# Altium PCB MiniBoard.PcbDoc
Units mil, origin at the board's own origin, x right, y up, seen from the top; angles counter-clockwise.
Board outline 3937.01 x 3937.01 mil, 2 copper layers (Top Layer, Bottom Layer); 94 components, 75 nets, 330 pads, 65 vias.
Unrouted connection lines stored in the file: 4.
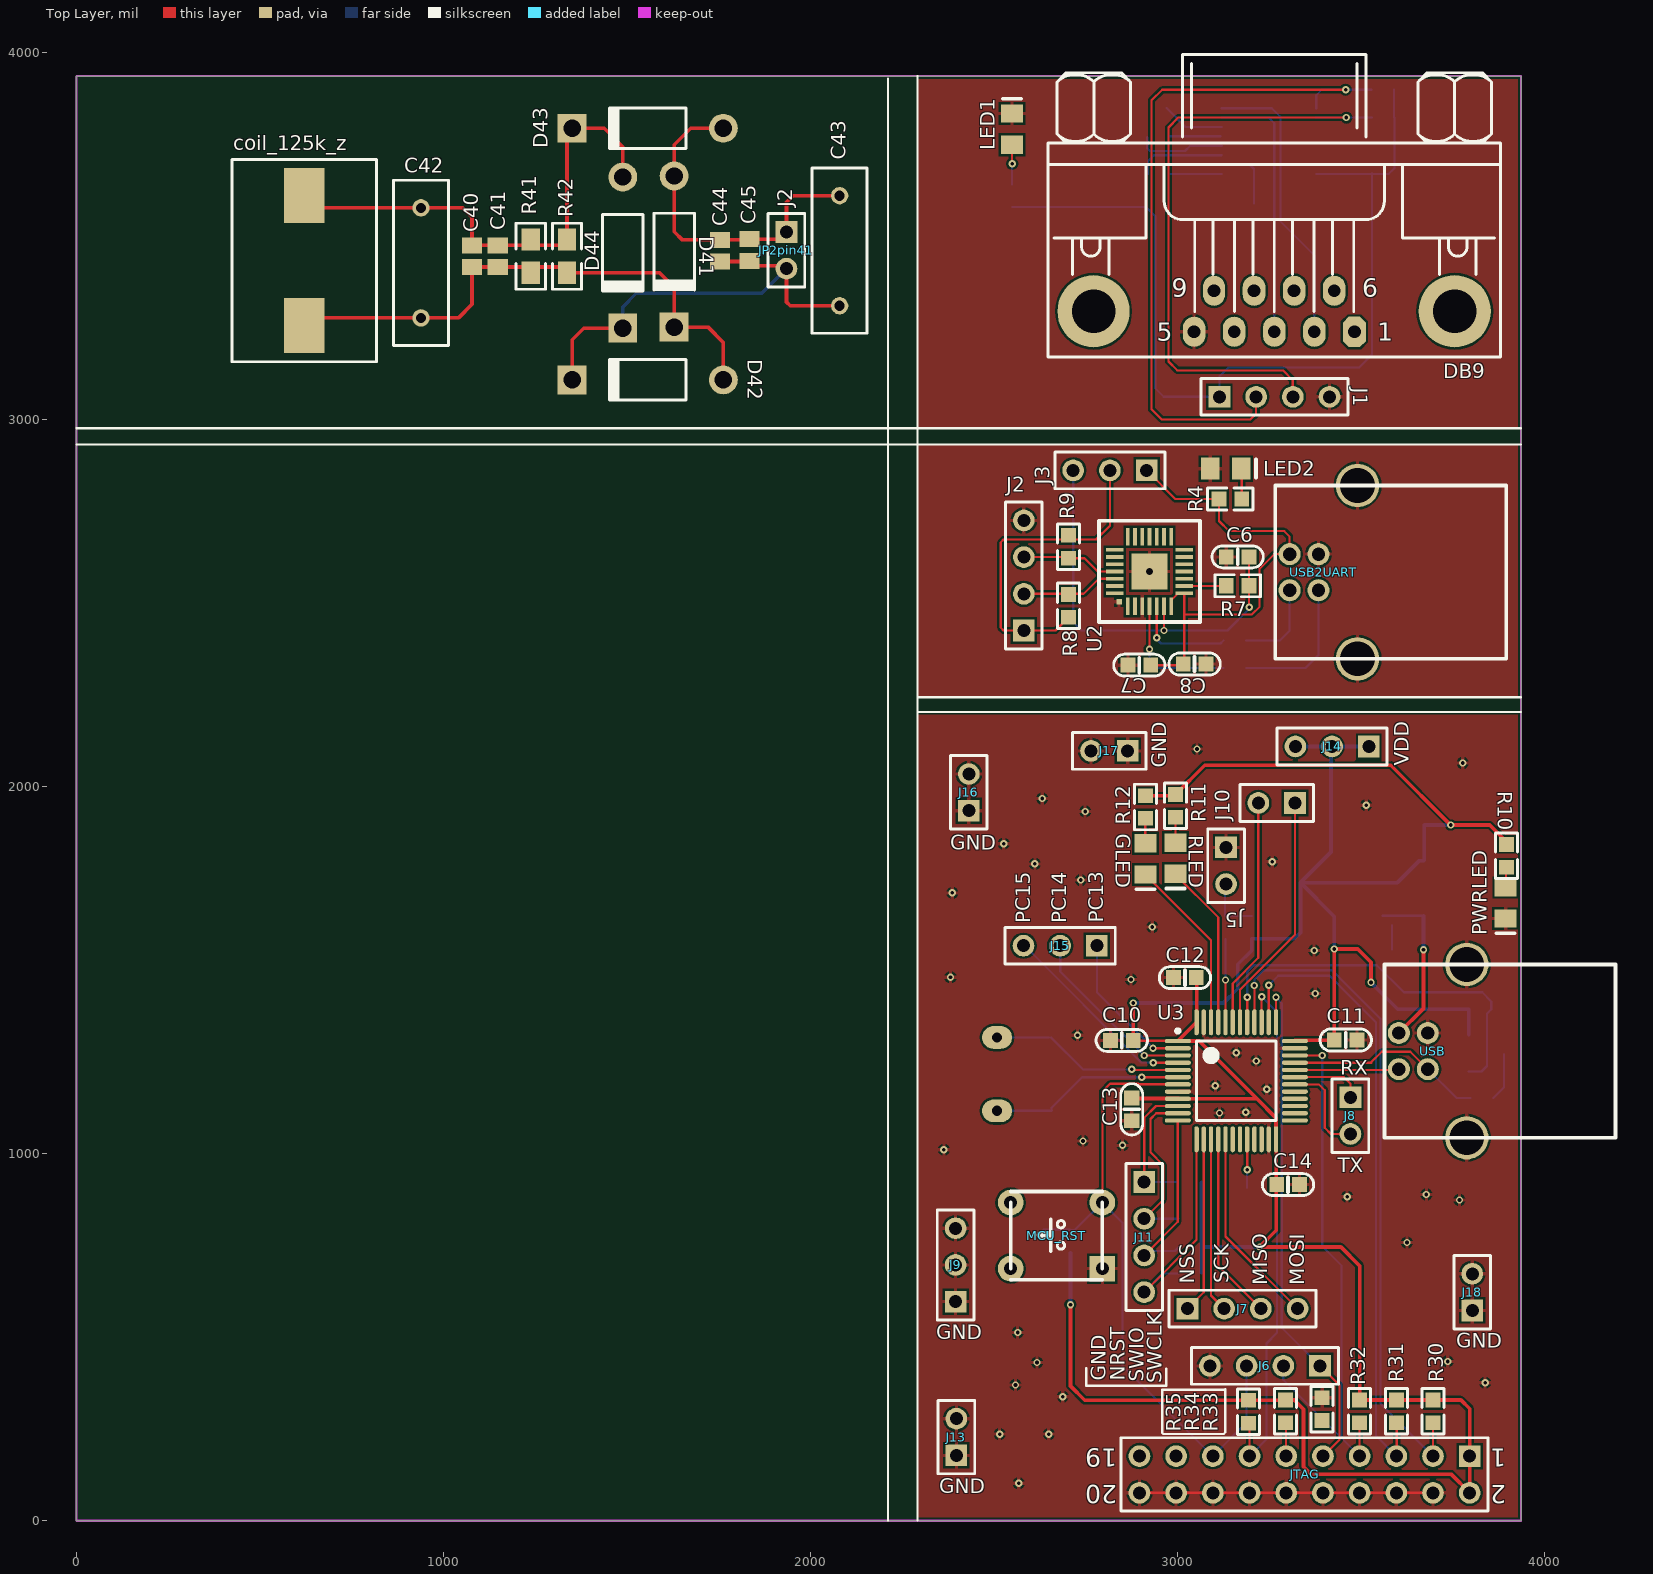
[diagram p0: Top Layer view]
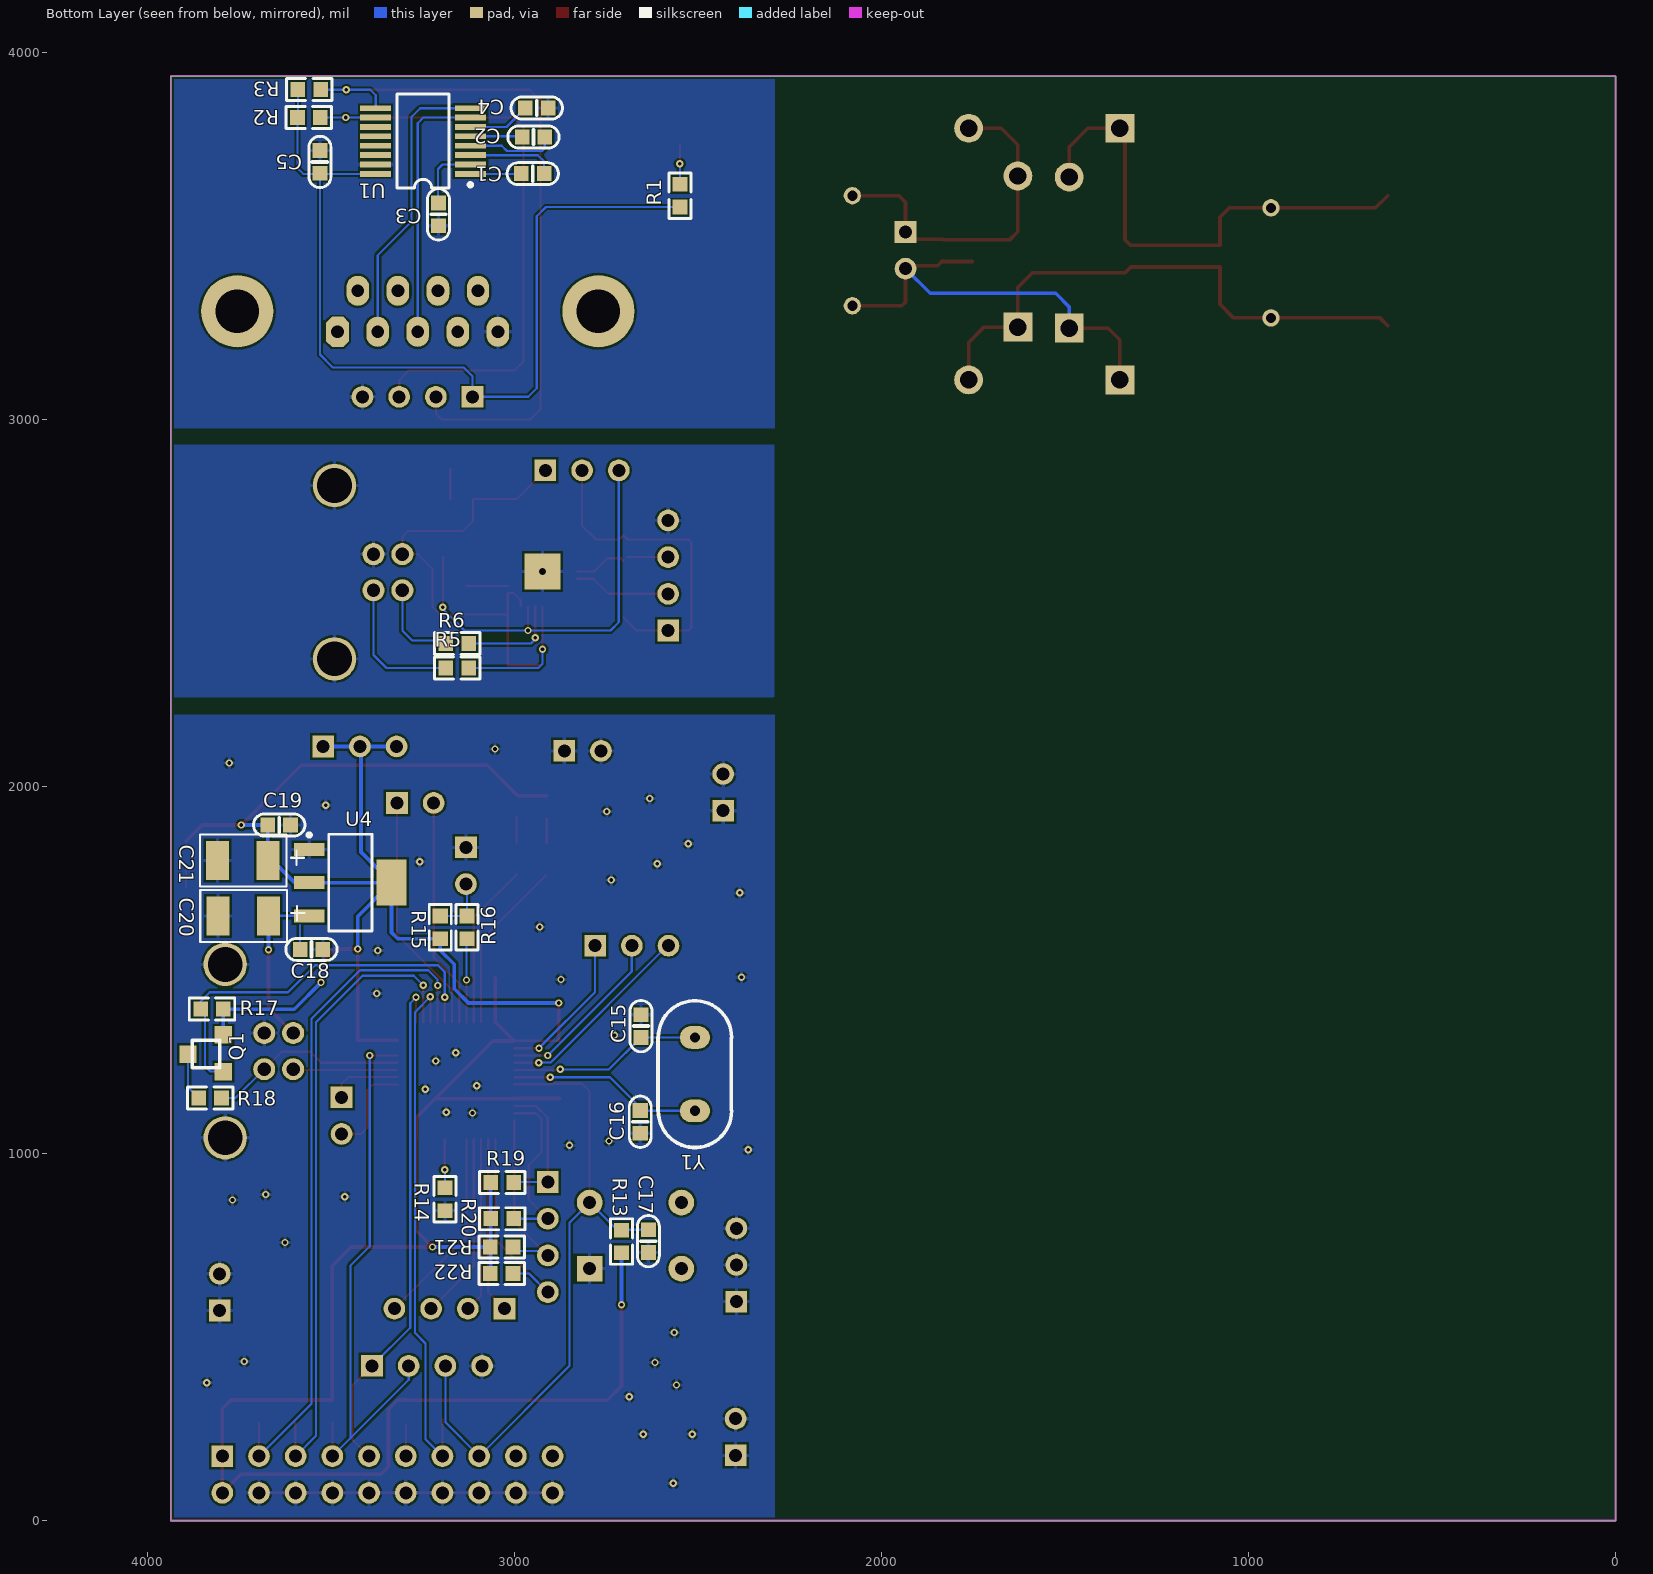
[diagram p1: Bottom Layer view, seen from below]
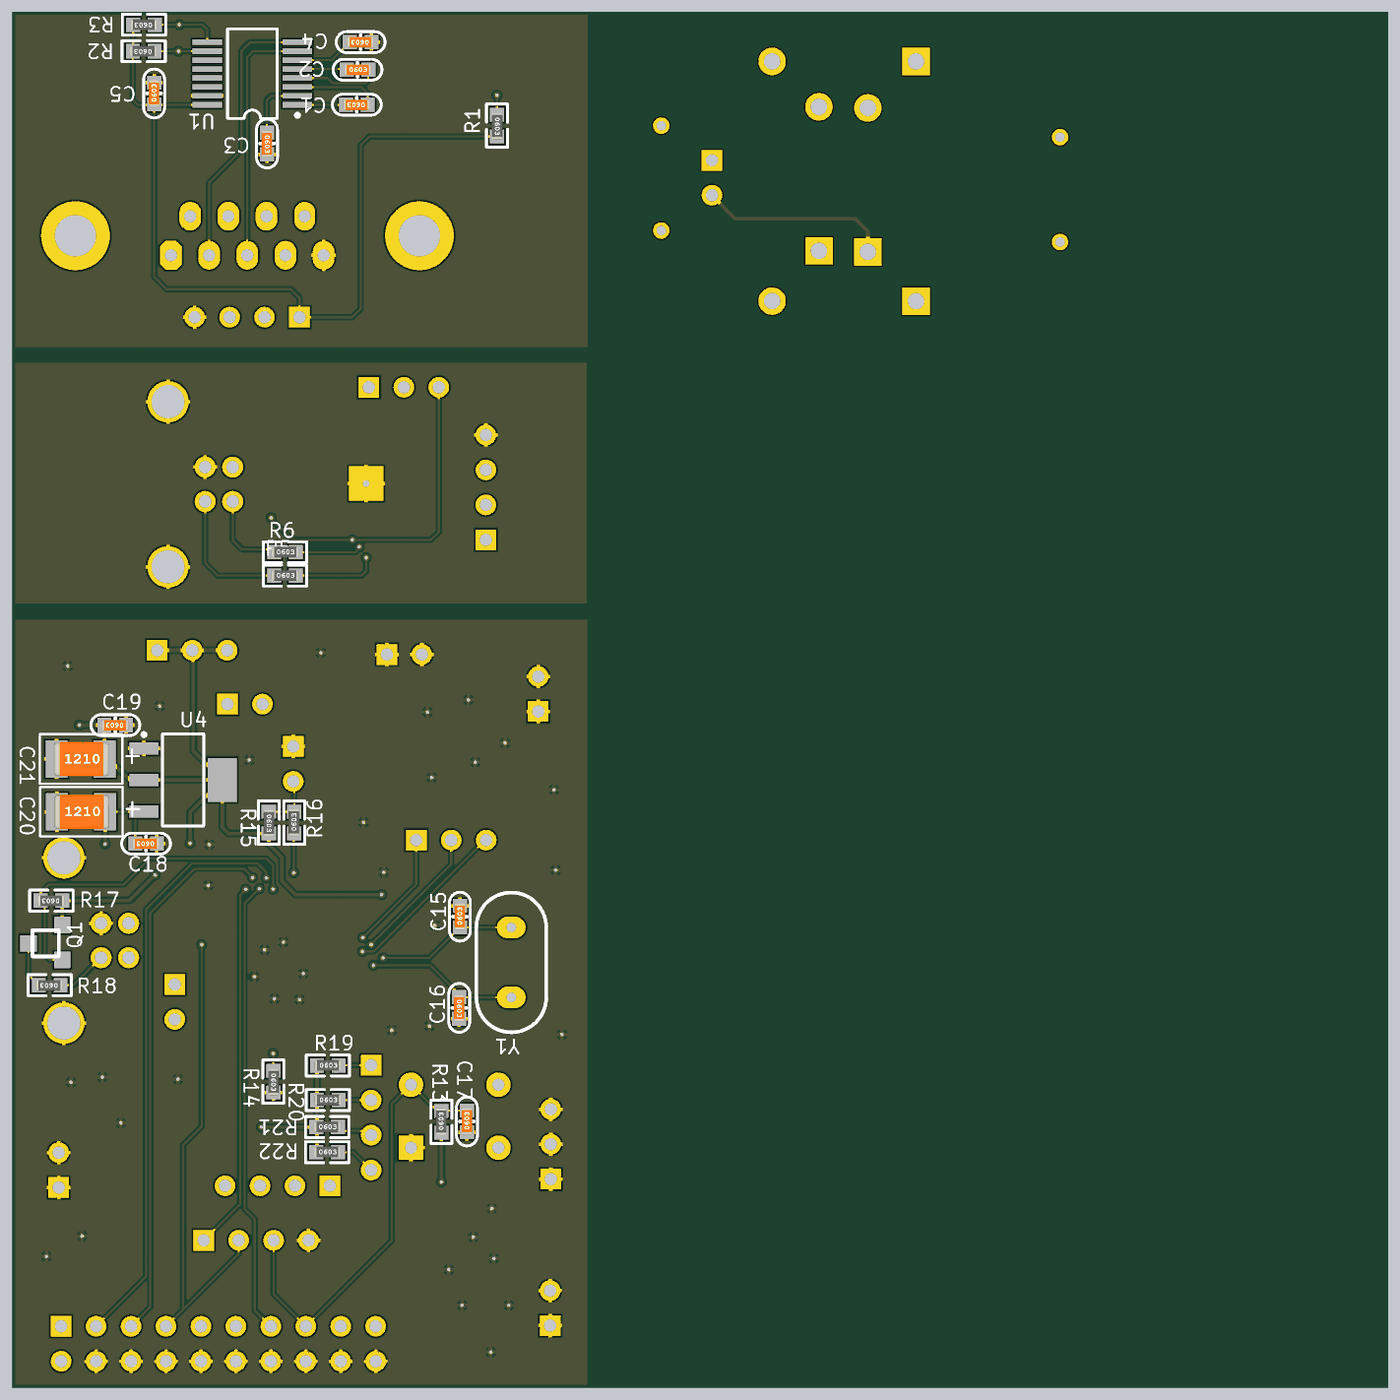
[diagram p2: 3D render of the assembled board from below, using the file's embedded part models]

## Layer stack, top to bottom
Top Layer: signal copper 1.4
Dielectric: dielectric 12.6, FR-4, Dk 4.8
Bottom Layer: signal copper 1.4

## Board outline
0,0 3937.01,0 3937.01,3937.01 3870.08,3937.01 0,3937.01 0,0

## Design rules (kind name [scope] priority, off if disabled: settings)
Clearance [All] p1: gap=6
PolygonConnect [All] p1: connectstyle=Relief reliefconductorwidth=10 reliefentries=4 polygonreliefangle="90 Angle"
RoutingVias [All] p1: holewidth=28 width=50 viastyle="Through Hole" minholewidth=28 minwidth=50 maxholewidth=28 maxwidth=50
SilkscreenOverComponentPads [All] p1: minsilkscreentomaskgap=10
SolderMaskExpansion [All] p1: expansion=4
Width [All] p1: maxlimit=10 minlimit=6 preferedwidth=6
27 further rules are at their usual default settings.

## Classes and differential pairs
component class MiniBoard: USB
component class Max3232: C1 C2 C3 C4 C5 DB9 J1 LED1 R1 R2 R3 U1
component class CP2102: C6 C7 J2 J3 LED2 R4 R5 R6 R7 R8 R9 U2 USB2UART
component class test_anta: C40 C41 C42 C43 C44 C45 coil_125k_z D41 D43 D44 JP2pin41 R41 R42

## Components (designator, comment, footprint, x,y, rotation, side; value= is the part's Value field where it differs from the comment)
C1 "0.1u" C0603 2951,3671 r0 bottom
C2 "0.47u" C0603 2949,3771 r180 bottom
C3 "0.47u" C0603 3208,3560 r270 bottom
C4 "0.47u" C0603 2940,3850 r0 bottom
C5 "0.1u" C0603 3531,3703 r90 bottom
C6 "0.1u" C0603 3164.54,2626.79 r180 top
C7 "1u" C0603 2896.82,2331.51 r180 top
C8 "0.1u" C0603 3047.24,2334.65 r0 top
C10 "0.1uF" C0603 2849,1309 r0 top
C11 "0.1uF" C0603 3459,1310 r180 top
C12 "0.1uF" C0603 3021,1480 r0 top
C13 "0.1uF" C0603 2876,1121 r90 top
C14 "0.1uF" C0603 3302,916 r180 top
C15 "20pF" C0603 2656,1348 r90 bottom
C16 "20pF" C0603 2658,1087 r270 bottom
C17 "0.1uF" C0603 2636,762 r90 bottom
C18 "0.1uF" C0603 3554,1557 r0 bottom
C19 "0.1uF" C0603 3642,1896 r0 bottom
C20 "10uF" 1210-A 3743,1648 r180 bottom
C21 "10uF" 1210-A 3744,1799 r180 bottom
C40 "CAP" C0805 1078,3446 r90 top
C41 "CAP" C0805 1148,3446 r90 top
C42 "CAP" RAD-0.3 939,3428 r90 top
C43 "Cap" RAD-0.3 2080,3461 r270 top
C44 "CAP" C0805 1754,3461 r90 top
C45 "CAP" C0805 1834,3463 r90 top
coil_125k_z "coli_125k" coil_125k 621,3434 r270 top
D41 "Diode 11DQ03" DO-204AL 1629,3458.83 r270 top
D42 "Diode 11DQ03" DO-204AL 1557,3109 r180 top
D43 "Diode 11DQ03" DO-204AL 1557,3794.83 r180 top
D44 "Diode 11DQ03" DO-204AL 1489,3455.83 r270 top
DB9 "DB9" DB9 3264,3296 r0 top locked
GLED "LED" LED0805 2913,1846 r270 top
J1 "CON4" HDR1X4 3115,3063 r0 top
J2 "CON4" HDR1X4 2581.86,2426 r90 top
J3 "CON3" HDR1X3 2916.5,2862.51 r180 top
J5 "CON2" HDR1X2 3133,1835 r270 top
J6 "SWD" SWD 3389,422 r180 top
J7 "SPI" HDR1X4 3028,578 r0 top
J8 "UART1" HDR1X2 3472,1154 r270 top
J9 "CON3" HDR1X3 2396,597 r90 top
J10 "IIC1" HDR1X2 3321,1956 r180 top
J11 "CON4" HDR1X4 2910,923 r270 top
J13 "IIC1" HDR1X2 2398,178 r90 top
J14 "CON3" HDR1X3 3522,2110 r180 top
J15 "CON3" HDR1X3 2781,1567 r180 top
J16 "IIC1" HDR1X2 2432,1935 r90 top
J17 "IIC1" HDR1X2 2865,2098 r180 top
J18 "IIC1" HDR1X2 3804,573 r90 top
JP2pin41 "JUMP2" HDR1X2 1935,3512 r270 top
JTAG "JTAG" HDR2X10 3797,176 r180 top
LED1 "" LED0805 2550,3750 r90 top
LED2 "" LED0805 3089.73,2866.94 r0 top
MCU_RST "BUTTON" BUTTON-S 2546,687 r90 top
PWRLED "LED" LED0805 3895,1726 r270 top
Q1 "SI2301" SOT-23-2301 3804,1234 r90 bottom
R1 "4.7K" R0603 2550,3611 r270 bottom
R2 "4.7K" R0603 3561,3824 r0 bottom
R3 "4.7K" R0603 3560,3900 r0 bottom
R4 "1K" R0603 3144.85,2784.27 r0 top
R5 "33" R0603 3156.66,2323.64 r180 bottom
R6 "33" R0603 3156.66,2390.57 r180 bottom
R7 "4.7K" R0603 3164.54,2548.05 r0 top
R8 "4.7K" R0603 2703.91,2492.93 r270 top
R9 "4.7K" R0603 2703.91,2654.35 r90 top
R10 "1K" R0603 3897,1812 r270 top
R11 "10K" R0603 2995,1948 r90 top
R12 "10K" R0603 2913,1945 r90 top
R13 "10K" R0603 2709,761 r90 bottom
R14 "100K" R0603 3190,876 r270 bottom
R15 "RES" R0603 3203,1617 r270 bottom
R16 "RES" R0603 3130,1617 r90 bottom
R17 "100K" R0603 3825,1394 r0 bottom
R18 "1.5K" R0603 3830,1152 r0 bottom
R19 "10K" R0603 3034,922 r180 bottom
R20 "10K" R0603 3034,823 r180 bottom
R21 "10K" R0603 3036,746 r180 bottom
R22 "10K" R0603 3036,674 r180 bottom
R30 "10K" R0603 3697,298 r270 top
R31 "10K" R0603 3598,298 r270 top
R32 "10K" R0603 3497,298 r270 top
R33 "10K" R0603 3395,304 r90 top
R34 "10K" R0603 3295,298 r270 top
R35 "10K" R0603 3194,297 r270 top
R41 "RES1" 0805 1238,3401 r90 top
R42 "RES1" 0805 1337,3401 r90 top
RLED "LED" LED0805 2995,1848 r270 top
U1 "MAX3232" SSOP-16-SP3232 3250,3760 r90 bottom
U2 "CP2102" CP2102 2825.95,2488.5 r90 top
U3 "STM32F103C8" LQFP48_N 3161,1199 r0 top
U4 "LM1117MP-3.3" MP04A_L 3448,1739 r180 bottom
USB "USB" USB-B 3604,1329 r180 top
USB2UART "USB" USB-B 3306.27,2634.17 r180 top
Y1 "8M" XTAL 2509,1217 r270 bottom

## Footprints (in the part's own frame and the unit in brackets; to place one, negate y for a bottom-side part, rotate by r counter-clockwise, add the part's x,y. Pads: shape width x height; smd on the part's side, far side on the other; paste and mask are expansions set on the pad)
0805 [mil]
  rect 60x50 smd: 1(0,0) 2(90,0)
  silkscreen extent -45,-40 135,40
1210-A [mm]
  rect 1.6x2.7 smd: 1(1.825,0) 2(-1.675,0)
  silkscreen extent -2.9,-1.8 4.3,1.8, body extent -1.87,-1.24 2.13,1.24, height 1.7
BUTTON-S [mil]
  rect 70x70 hole 35: 1(0,-250)
  round 70 hole 35: 2(180,-250) 3(0,0) 4(180,0)
  silkscreen extent -30,-250 210,0
C0603 [mil] "电?"
  rect 40x41 smd: 1(-31,0) 2(31,0)
  silkscreen extent -70,-30 70,30, body extent -39,-15 40,16, height 31
C0805 [mm] "Chip Capacitor, Bo"
  rect 1.1x1.4 smd: 1(-0.75,0) 2(0.75,0)
  body extent -1.1,-0.72 1.1,0.72, height 1.4
coil_125k [mm]
  rect 3.8x2.8 smd: 1(-4.5,0) 2(4.5,0)
  silkscreen extent -7,-5 7,5
CP2102 [mm]
  rect 0.4x0.4 smd: 0(0.4,-0.4)
  rect 2.5x2.5 hole 0.5: 0(2.5,-2.5)
  rect 1.2x0.254 smd: 1(0.1,-1) 2(0.1,-1.5) 3(0.1,-2) 4(0.1,-2.5) 5(0.1,-3) 6(0.1,-3.5) 7(0.1,-4) 15(4.9,-4) 16(4.9,-3.5) 17(4.9,-3) 18(4.9,-2.5) 19(4.9,-2) 20(4.9,-1.5) 21(4.9,-1)
  rect 0.254x1.2 smd: 8(1,-4.9) 9(1.5,-4.9) 10(2,-4.9) 11(2.5,-4.9) 12(3,-4.9) 13(3.5,-4.9) 14(4,-4.9) 22(4,-0.1) 23(3.5,-0.1) 24(3,-0.1) 25(2.5,-0.1) 26(2,-0.1) 27(1.5,-0.1) 28(1,-0.1)
  silkscreen extent -1,-6 6,1
DB9 [mil]
  oct 62x82 hole 35: 1(218.75,-55.83)
  oval 62x82 hole 35: 2(109.58,-55.83) 3(0.42,-55.83) 4(-108.75,-55.83) 5(-217.92,-55.83) 6(163.75,55.83) 7(54.58,55.83) 8(-54.58,55.83)
  oval 60x82 hole 35: 9(-163.75,55.83)
  round 196.67 hole 118.33: BO1(-492.08,0) BO2(492.08,0)
  silkscreen extent -616,-125 617,700
DO-204AL [mm] "Diode, Axial; Body 5.2 x 2.7 mm (LxDia. max), Lead Dia. 0.86 mm (max)"
  round 2 hole 1.2: 1(-5.23,0)
  rect 2x2 hole 1.2: 2(5.23,0)
  silkscreen extent -2.65,-1.41 2.74,1.4
HDR1X2 [mm] "Connector; Header; 2 Position"
  rect 1.5x1.5 hole 0.9: 1(0,0)
  round 1.5 hole 0.9: 2(2.54,0)
  silkscreen extent -1.27,-1.27 3.81,1.27
HDR1X3 [mm] "Connector; Header; 3 Position"
  rect 1.5x1.5 hole 0.9: 1(0,0)
  round 1.5 hole 0.9: 2(2.54,0) 3(5.08,0)
  silkscreen extent -1.27,-1.27 6.35,1.27
HDR1X4 [mm] "Connector; Header; 4 Position"
  rect 1.5x1.5 hole 0.9: 1(0,0)
  round 1.5 hole 0.9: 2(2.54,0) 3(5.08,0) 4(7.62,0)
  silkscreen extent -1.27,-1.27 8.89,1.27
HDR2X10 [mm] "Connector; Header; 10x2 Position"
  rect 1.5x1.5 hole 0.9: 1(0,0)
  round 1.5 hole 0.9: 2(0,2.54) 3(2.54,0) 4(2.54,2.54) 5(5.08,0) 6(5.08,2.54) 7(7.62,0) 8(7.62,2.54) 9(10.16,0) 10(10.16,2.54) 11(12.7,0) 12(12.7,2.54) 13(15.24,0) 14(15.24,2.54) 15(17.78,0) 16(17.78,2.54) 17(20.32,0) 18(20.32,2.54) 19(22.86,0) 20(22.86,2.54)
  silkscreen extent -1.27,-1.27 24.13,3.81
LED0805 [mil]
  rect 50x60 smd: 1(0,0) 2(85,0)
  silkscreen extent 125,-25 125,25, body extent 0,-18 82,18, height 33
LQFP48_N [mm] "Thin QFP, 48-Leads, Body 7x7mm, Pitch 0.5mm, IPC Medium Density"
  oval 1.8x0.3 smd: 1(-4.05,2.75) 2(-4.05,2.25) 3(-4.05,1.75) 4(-4.05,1.25) 5(-4.05,0.75) 6(-4.05,0.25) 7(-4.05,-0.25) 8(-4.05,-0.75) 9(-4.05,-1.25) 10(-4.05,-1.75) 11(-4.05,-2.25) 12(-4.05,-2.75) 25(4.05,-2.75) 26(4.05,-2.25) 27(4.05,-1.75) 28(4.05,-1.25) 29(4.05,-0.75) 30(4.05,-0.25) 31(4.05,0.25) 32(4.05,0.75) 33(4.05,1.25) 34(4.05,1.75) 35(4.05,2.25) 36(4.05,2.75)
  oval 0.3x1.8 smd: 13(-2.75,-4.05) 14(-2.25,-4.05) 15(-1.75,-4.05) 16(-1.25,-4.05) 17(-0.75,-4.05) 18(-0.25,-4.05) 19(0.25,-4.05) 20(0.75,-4.05) 21(1.25,-4.05) 22(1.75,-4.05) 23(2.25,-4.05) 24(2.75,-4.05) 37(2.75,4.05) 38(2.25,4.05) 39(1.75,4.05) 40(1.25,4.05) 41(0.75,4.05) 42(0.25,4.05) 43(-0.25,4.05) 44(-0.75,4.05) 45(-1.25,4.05) 46(-1.75,4.05) 47(-2.25,4.05) 48(-2.75,4.05)
  silkscreen extent -4.17,-2.75 2.75,3.57, body extent -3.5,-3.5 3.5,3.5, height 1.6
MP04A_L [mm] "SOT223, 4-Leads, Body 6.5x3.5mm, Pitch 2.3mm, Lead Span 7mm, IPC High Density"
  rect 2.1x0.9 smd: 1(-2.85,2.3) 2(-2.85,0) 3(-2.85,-2.3)
  rect 2.1x3.2 smd: 4(2.85,0)
  silkscreen extent -2.98,-3.35 1.5,3.42, body extent -1.85,-3.35 1.85,3.35, height 1.8
R0603 [mil] "电?"
  rect 40x41 smd: 1(-31,0) 2(31,0)
  silkscreen extent -62,-30 62,30, body extent -39,-15 40,16, height 32
RAD-0.3 [mm] "Radial Cap, Thru-Hol"
  round 1.2 hole 0.7: 1(-3.81,0) 2(3.81,0)
  silkscreen extent -5.71,-1.91 5.71,1.91
SOT-23-2301 [mm]
  rect 1.2x1.2 smd: 1(-0.254,-0.254) 2(2.286,-0.254) 3(0.95,2.2)
  silkscreen extent 0,0 1.91,1.91
SSOP-16-SP3232 [mm]
  rect 0.4x2.15 smd: 1(-2.275,-3.275) 2(-1.625,-3.275) 3(-0.975,-3.275) 4(-0.325,-3.275) 5(0.325,-3.275) 6(0.975,-3.275) 7(1.625,-3.275) 8(2.275,-3.275) 9(2.275,3.275) 10(1.625,3.275) 11(0.975,3.275) 12(0.325,3.275) 13(-0.325,3.275) 14(-0.975,3.275) 15(-1.625,3.275) 16(-2.275,3.275)
  silkscreen extent -3.25,-3.4 3.25,1.8
SWD [mm] "Connector; Header; 4 Position"
  rect 1.5x1.5 hole 0.9: 1(0,0)
  round 1.5 hole 0.9: 2(2.54,0) 3(5.08,0) 4(7.62,0)
  silkscreen extent -1.27,-1.27 8.89,1.27
USB-B [mm]
  round 1.524 hole 0.92: 1(0,0) 2(0,2.5) 3(-2,2.5) 4(-2,0)
  round 3 hole 2.4: 5(-4.7,7.25) 6(-4.7,-4.75)
  silkscreen extent -15,-4.75 1,7.25
XTAL [mil]
  oval 62x82 hole 28: 1(-100,0) 2(100,0)
  silkscreen extent -200,-100 200,100

## Part data
C1 C2 C3 C4 C5 C6 C7 C8: library part CAP
C10 C11 C12 C13 C14 C15 C16 C17: library part CAP, "Capacitor"
C18 C19: library part Cap, "Capacitor"
C20 C21: library part "Cap Pol1", "Polarized Capacitor (Radial)"
C40 C41 C42 C44 C45: "一般瓷片电容、直插选用RAD0.1，贴片选用0805"
C43: "Capacitor"
D41 D42 D43 D44: "Schottky Rectifier"
J1 J2 J3 J5 J6 J9 J11 J14 J15: "Connector"
J7: library part CON4, "USART"
J8 J10 J13 J16 J17 J18: library part CON2, "Connector"
JP2pin41: "单线跳线（短路）连接器，一般使用SIP2即可，当需要标示插件方向时可选SIP2-ST（间距2.54mm），当"
JTAG: library part "Header 10X2", "Header, 10-Pin, Dual row"
LED1 LED2: library part LED
Q1: library part PMOS-2, "P-Channel Power MOSFET"
R1 R4 R5 R6: library part res
R2 R3 R7 R8 R9 R10 R11 R12 R13 R14: library part RES
R17 R18 R30 R31 R32 R33 R34 R35: library part Res2, "Resistor"
R19 R20 R21 R22: library part R
R41 R42: "电阻，1/4w的金属膜直插可选AXIAL0.4封装（长度10"
U4: "800mA Low-Dropout Linear Regulator"
Y1: library part CRYSTAL

## Via types
v1: diameter 20, hole 10, Top Layer to Bottom Layer, tented both sides, 65 vias

## Nets (pads, with @x,y where several pads share a name; then routed paths per layer and width w, separated by ;. In a path a pad name is that pad's centre, name@x,y a point inside that pad or via, vN(x,y) a via of type N, cw(c..) or ccw(c..) an arc to the next point about the centre after c; other vN are vias at no path point)
+5: C18.2 C20.1 U4.3 USB.1 | length 525.1
  Top Layer w10: USB.1 3671,1396 v1(3671,1556)
  Bottom Layer w6: U4.3 C20.1@3670.7,1648.45 ; C18.2 3585,1623.65
  Bottom Layer w10: v1@3671.15,1554.85 C20.1
BOOT0: R16.1 U3.44 | length 226.1
  Top Layer w6: U3.44 v1(3131.47,1473.47)
  Bottom Layer w6: v1(3131.47,1473.47) R16.1@3131.47,1584.53
BOOT1: R14.1 U3.20 | length 132.8
  Top Layer w6: v1@3190,956 v1(3190.53,956.53) U3.20
  Bottom Layer w6: R14.1 v1@3190,956
CT_CLK: U3.25
CT_IO: U3.21
CT_RST: U3.22
CT_VCC: U3.26
DATA+: R5.1 USB2UART.3 | length 388.7
  Bottom Layer w6: R5.1 3349.57,2323.64 3385.01,2359.07 USB2UART.3
DATA-: R6.1 USB2UART.2 | length 239.8
  Bottom Layer w6: R6.1@3187.66,2398.44 3278.71,2398.44 3306.27,2426 USB2UART.2
DOUT2: DB9.3 U1.7 | length 718.1
  Bottom Layer w6: U1.7 3249.02,3823.98 3264.42,3808.58 DB9.3
GND: C3.2 C4.1 C5.2 C6.2 C7.2 C8.2 C10.1 C11.1 C12.1 C13.1 C14.1 C15.2 C16.2 C17.1 C18.1 C19.1 C20.2 C21.2 DB9.5 J1.4 J2.4 J5.1 J6.4 J9.1 J9.2 J9.3 J13.1 J13.2 J16.1 J16.2 J17.1 J17.2 J18.1 J18.2 JTAG.4 JTAG.6 JTAG.8 JTAG.10 JTAG.12 JTAG.14 JTAG.16 JTAG.18 JTAG.20 LED1.2 LED2.1 MCU_RST.1 PWRLED.2 R14.2 R33.2 U1.15 U2.0 U2.3 U3.8 U3.23 U3.35 U3.47 U4.1 USB2UART.4 USB2UART.5 USB2UART.6 USB.4 USB.5 USB.6 | length 803
  Top Layer w6: JTAG.20 JTAG.18 JTAG.16 JTAG.14 JTAG.12 JTAG.10 JTAG.8 JTAG.6 JTAG.4 JTAG.4@3700,76
  other v1: 2568,102 2516,236 2650,236 2688,338 2559,370 3839,376 2618,431 3737,434 2565,513 3626,758 3769,874 3463,883 3679,889 2364,1011 2851,1023 2743,1035 3115,1111 3187,1113 3244,1176 3104,1185 3215,1253 3161,1275 2728,1323 3376,1437 2874,1475 2382,1481 3373,1554 2932,1618 2387,1711 2737,1746 2612,1790 3259,1796 2527,1845 2749,1933 3515,1950 2632,1968 3778,2065 3054,2103
I2C1_SCL: J10.1 U3.42 | length 659.7
  Top Layer w6: U3.42 3170.84,1446.84 3321,1597 J10.1
I2C1_SDA: J10.2 U3.43 | length 626.5
  Top Layer w6: U3.43 3151.16,1464.16 3221,1534 J10.2
NetC1_1: C1.1 U1.3 | length 241.4
  Bottom Layer w6: C1.1 2920,3704 2937,3721 3120.45,3721 U1.3
NetC1_2: C1.2 U1.1 | length 138.5
  Bottom Layer w6: C1.2@2982.57,3670.43 U1.1
NetC2_1: C2.1 U1.5 | length 137.3
  Bottom Layer w6: C2.1@2980,3773 U1.5@3117.27,3773
NetC2_2: C2.2 U1.4 | length 242.8
  Bottom Layer w6: C2.2 2918,3740 2925,3733 3021,3733 3035.2,3747.2 U1.4
NetC3_1: C3.1 U1.2 | length 186.9
  Bottom Layer w6: U1.2 3196.98,3696.02 3209,3684 C3.1@3209,3590
NetC4_2: C4.2 U1.6 | length 171.4
  Bottom Layer w6: C4.2 3022.61,3798.39 U1.6
NetC40_1: C40.1 C41.1 C42.1 coil_125k_z.2 D41.2 D42.1 R41.1 R42.1 | length 1517.9
  Top Layer w10: coil_125k_z.2 642.17,3278 C42.1 1041,3278 1078,3315 C40.1 C41.1 1321.53,3416.47 R42.1 1589,3401 1629,3361 D41.2 1721.07,3252.93 1762.91,3211.09 D42.1
NetC40_2: C40.2 C41.2 C42.2 coil_125k_z.1 D43.2 D44.1 R41.2 R42.2 | length 1374.3
  Top Layer w10: coil_125k_z.1 654.17,3578 C42.2 1052,3578 1078,3552 C40.2 C41.2 1321.53,3475.53 R42.2 1337,3780.74 D43.2 1438.17,3794.83 1489,3744 D44.1
NetC43_1: C43.1 C44.2 C45.2 D41.1 D43.1 JP2pin41.1 | length 944.3
  Top Layer w10: D43.1 1673.83,3794.83 1629,3750 D41.1 1629,3513 1651.47,3490.53 C44.2 C45.2@1832,3490.53 ; C45.2 1915.53,3492.53 JP2pin41.1 1935,3593 1953,3611 C43.1
NetC43_2: C43.2 C44.1 C45.1 D42.2 D44.2 JP2pin41.2 | length 1235.4
  Top Layer w10: D42.2 1351.09,3218.09 1382.93,3249.93 D44.2 ; C44.1 C45.1@1832,3431.47 ; C45.1 1847.47,3420 1927,3420 JP2pin41.2 1935,3321 1945,3311 C43.2
  Bottom Layer w10: D44.2 1489,3308 1526,3345 1868,3345 JP2pin41.2
NetGLED_1: GLED.1 R12.1 | length 68
  Top Layer w6: GLED.1 R12.1
NetJ5_2: J5.2 R15.1 R16.2 | length 163
  Bottom Layer w6: J5.2@3130,1738 R16.2 R15.1
NetLED1_1: LED1.1 R1.1 | length 108
  Top Layer w6: v1(2550,3698) LED1.1
  Bottom Layer w6: R1.1 v1(2550,3698)
NetLED2_2: LED2.2 R4.2 | length 81.6
  Top Layer w6: R4.2 LED2.2@3175.85,2865.83
NetPWRLED_1: PWRLED.1 R10.2 | length 63
  Top Layer w6: PWRLED.1@3896,1727 R10.2@3896,1790
NetQ1_2: Q1.3 R18.2 | length 131.7
  Bottom Layer w6: R18.2 3890.61,1181.61 Q1.3
NetR5_2: R5.2 U2.4 | length 363.2
  Top Layer w6: v1(2924.38,2374.82) U2.4
  Bottom Layer w6: v1(2924.38,2374.82) 2924.38,2335.45 2936.19,2323.64 R5.2
NetR6_2: R6.2 U2.5 | length 279.8
  Top Layer w6: v1(2944.06,2406.31) U2.5
  Bottom Layer w6: v1(2944.06,2406.31) 2944.06,2402.38 2955.87,2390.57 3117.79,2390.57 R6.2@3125.66,2398.44
NetR7_1: R7.1 U2.9 | length 114.2
  Top Layer w6: U2.9 R7.1@3133.04,2547.55
NetR11_1: R11.1 RLED.1 | length 69
  Top Layer w6: RLED.1 R11.1
NRST: C17.2 J6.3 JTAG.15 MCU_RST.2 R13.2 U3.7 | length 1794.6
  Top Layer w6: MCU_RST.2 2796,1170 2816.94,1190.94 2894.44,1190.94 2895.76,1189.63 3000.65,1189.63 U3.7@3001.97,1190.94
  Bottom Layer w6: C17.2 R13.2@2708,793 ; R13.2 2721,792 MCU_RST.2 2851,812 2851,422 JTAG.15 3189,268 J6.3@3189,408
OSC_IN: C15.1 U3.5 Y1.1 | length 523.2
  Top Layer w6: v1(2876,1230) 2877.47,1228.53 U3.5
  Bottom Layer w6: Y1.1 C15.1@2650,1317 ; C15.1 2743,1230 v1(2876,1230)
OSC_OUT: C16.1 U3.6 Y1.2 | length 536
  Top Layer w6: v1(2903.63,1208.63) U3.6@3000.97,1208.63
  Bottom Layer w6: Y1.2 C16.1@2657,1117 ; C16.1 C16.1@2657,1117 ; v1(2903.63,1208.63) 2740.63,1208.63 2657,1125 C16.1@2657,1117
PA0: J11.1 R19.2 U3.10 | length 371.8
  Top Layer w6: J11.1 2910,1098 2942.1,1130.1 U3.10
  Bottom Layer w6: J11.1 R19.2@3002,923
PA1: J11.2 R20.2 U3.11 | length 482
  Top Layer w6: J11.2 2962,875 2962,969 2927,1004 2927,1095 2942.42,1110.42 U3.11
  Bottom Layer w6: J11.2 R20.2
PA2: J11.3 R21.2 U3.12 | length 510.2
  Top Layer w6: J11.3 3001.55,814.55 U3.12
  Bottom Layer w6: J11.3 2922,735 2994,735 R21.2
PA3: J11.4 R22.2 U3.13 | length 591.8
  Top Layer w6: J11.4 3052.73,765.73 U3.13
  Bottom Layer w6: J11.4 2961,674 R22.2
PA8: U3.29
PB0: U3.18
PB1: U3.19
PB3: JTAG.13 R35.2 U3.39 | length 1469.9
  Top Layer w6: JTAG.13 R35.2@3197,276 ; U3.39 v1(3229.9,1427.9)
  Bottom Layer w6: JTAG.13 3243,222 3243,483 3272,512 3272,1385.8 v1(3229.9,1427.9)
PB4: JTAG.3 R30.2 U3.40 | length 1868.9
  Top Layer w6: v1@3209,1460 v1(3210.21,1458.79) U3.40 ; JTAG.3 R30.2
  Bottom Layer w6: v1(3210.21,1458.79) 3210.21,1474.21 3236,1500 3422,1500 3554,1368 3554,319 JTAG.3
PB5: Q1.1 R17.2 U3.41 | length 1088.4
  Top Layer w6: U3.41 v1(3190.53,1426.53)
  Bottom Layer w6: v1(3190.53,1426.53) 3190.53,1495.53 3209,1514 3544,1514 3618,1440 3831,1440 3856,1415 R17.2 3844,1382 3844,1239 3829,1224 Q1.1
PB8: RLED.2 U3.45 | length 452.3
  Top Layer w6: RLED.2@2994,1762 3111.79,1644.21 U3.45
PB9: GLED.2 U3.46 | length 473.9
  Top Layer w6: GLED.2@2915,1759 3092.1,1581.9 U3.46
PB14: U3.27
PB15: U3.28
PC13: J15.1 U3.2 | length 409.9
  Top Layer w6: v1@2934,1287.58 U3.2
  Bottom Layer w6: J15.1 2781,1441 v1(2934,1288)
PC14: J15.2 U3.3 | length 485.5
  Top Layer w6: v1(2910,1267.9) U3.3
  Bottom Layer w6: J15.2 2681,1496.9 v1(2910,1267.9)
PC15: J15.3 U3.4 | length 552.7
  Top Layer w6: v1@2935,1248.21 U3.4
  Bottom Layer w6: J15.3 2584.03,1567 2902.13,1248.9 2934.1,1248.9 v1(2935,1248)
RIN2: DB9.2 U1.8 | length 793.9
  Bottom Layer w6: U1.8 3257.43,3849.57 3281,3826 3281,3541 3373.58,3448.42 DB9.2
RTCK: JTAG.11 R34.2 | length 84
  Top Layer w6: JTAG.11@3296,177 R34.2@3296,261
RX: J8.1 U3.31 | length 195.9
  Top Layer w6: U3.31 3454.16,1208.84 3472,1191 J8.1
RX1: J2.3 R9.1 U2.25 | length 255.4
  Top Layer w6: J2.3 R9.1@2693.38,2626 ; R9.1@2703.91,2615.47 2711.28,2622.85 2747.21,2622.85 2783.14,2586.92 U2.25
RX2: J1.2 R3.1 U1.9 | length 1923.9
  Top Layer w6: J1.2 3215,3017 3199,3001 2958,3001 2930,3029 2930,3871 2959,3900 v1(3459,3900)
  Bottom Layer w6: U1.9 3378.94,3884.94 3394,3900 v1(3459,3900) R3.1
SPI1_MISO: J7.3 U3.16 | length 509.7
  Top Layer w6: U3.16 3111.79,694.21 J7.3
SPI1_MOSI: J7.4 U3.17 | length 543
  Top Layer w6: U3.17 3131.47,774.53 J7.4
SPI1_NSS: J7.1 U3.14 | length 479.9
  Top Layer w6: J7.1 3072.42,622.42 U3.14
SPI1_SCK: J7.2 U3.15 | length 476.4
  Top Layer w6: U3.15 3092.1,613.9 J7.2
SWCLK: J6.1 JTAG.9 R33.1 U3.37 | length 1408.3
  Top Layer w6: U3.37 v1(3269.27,1426.27) ; J6.1 3442,369 3442,221 JTAG.9
  Bottom Layer w6: v1(3269.27,1426.27) 3285,1410.54 3285,526 J6.1
SWIO: J6.2 JTAG.7 R32.2 U3.34 | length 1562.5
  Top Layer w6: U3.34 v1(3394.9,1267.9) ; JTAG.7 R32.2
  Bottom Layer w6: J6.2 3289,384 3448,225 ; v1(3394.9,1267.9) 3394.9,748.1 3448,695 3448,225 ; JTAG.7 3448,225
TDI: JTAG.5 R31.2 U3.38 | length 1753.7
  Top Layer w6: U3.38 v1(3249.58,1459.58) ; JTAG.5@3598,177 R31.2
  Bottom Layer w6: v1@3251.17,1458 v1(3249.58,1459.58) 3275,1485 3415,1485 3542,1358 3542,231 JTAG.5
TX: J8.2 U3.30 | length 267.3
  Top Layer w6: U3.30 3385.84,1189.16 3402,1173 3402,1071 3419,1054 J8.2
TX1: J2.2 R8.1 U2.26 | length 265.1
  Top Layer w6: J2.2 2744.85,2526 2786.09,2567.24 U2.26
TX2: J1.3 R2.1 U1.10 | length 1690.4
  Top Layer w6: J1.3 3315,3108 3288,3135 3000,3135 2976,3159 2976,3797 3003,3824 v1(3461,3824)
  Bottom Layer w6: U1.10 R2.1
USB_DM: U3.32 USB.2 | length 282.9
  Top Layer w6: U3.32@3320.87,1228.31 USB.2@3603.74,1228.31
USB_DP: R18.1 U3.33 USB.3 | length 541.9
  Top Layer w6: U3.33 3528.58,1248.21 ; 3529,1250 3557,1278 3635.32,1278 USB.3
  Bottom Layer w6: USB.3 3761.32,1152 R18.1
VCC_3V3: C6.1 J3.3 R7.2 U2.6 | length 1134.8
  Top Layer w6: v1(2963.75,2426) U2.6 ; v1@3195.54,2489.49 R7.2 C6.1
  Bottom Layer w6: J3.3 2716.5,2448.83 2739.34,2426 v1(2963.75,2426) 3136.98,2426 3196.03,2485.06 v1(3196.03,2488.99)
VCC_5V: C7.1 C8.1 J3.1 R4.1 U2.7 U2.8 USB2UART.1 | length 1312
  Top Layer w6: J3.1 2994.75,2784.27 R4.1 3113.85,2724.73 3141.73,2696.85 3291.34,2696.85 3306.27,2681.92 USB2UART.1 3264.09,2634.17 3224.54,2594.61 3224.54,2490.63 3203.9,2469.99 3021.17,2469.99 3018.87,2467.69 ; C7.1 C8.1@3018.87,2331.51 ; U2.7 2983.43,2508.68 3002.62,2527.87 U2.8 C8.1@3018.87,2331.51 ; C8.1@3019.36,2331.51 C8.1@3018.87,2331.51
VCC_C: J2.1 J3.2 R8.2 R9.2 | length 912.1
  Top Layer w6: R8.2 2667.98,2426 J2.1 2526.74,2426 2518.87,2433.87 2518.87,2666.16 2526.74,2674.03 2692.59,2674.03 R9.2 2715.22,2674.03 2778.71,2674.03 2816.5,2711.83 J3.2
VCC_M: C5.1 J1.1 R1.2 R2.2 R3.2 U1.16 | length 2476.8
  Bottom Layer w6: R1.2 2915,3580 2940,3555 2940,3086 2963,3063 J1.1 3115,3119 3139,3143 3496,3143 3531,3178 C5.1@3531,3670.43 ; U1.16 C5.1@3531,3670.43 ; C5.1 C5.1@3531,3670.43 ; R2.2@3591,3825 R3.2 ; R2.2 3592,3686 3576.43,3670.43 C5.1@3531,3670.43
VDD: C10.2 C11.2 C12.2 C13.2 C14.2 C19.2 C21.1 J14.1 J14.2 J14.3 JTAG.1 JTAG.2 Q1.2 R10.1 R11.2 R12.2 R13.1 R15.2 R17.1 R19.1 R20.1 R21.1 R22.1 R30.1 R31.1 R32.1 R34.1 R35.1 U3.1 U3.9 U3.24 U3.36 U3.48 U4.2 U4.4 | length 8824.5
  Top Layer w6: C10.2@2879,1308 U3.1@3000.91,1308
  Top Layer w10: v1(2709,589) 2709,367 2748,328 R35.1 R34.1@3294,328 ; C13.2@2878,1150.57 U3.9@3003.97,1150.57 ; C10.2 v1(2880,1411) ; R12.2 2992,1976 R11.2 3075,2059 3582,2059 v1(3745,1896) 3852,1896 R10.1@3896,1852 ; U3.9 3217.21,1149.79 ; U3.48 U3.1 3059.73,1307.27 3217.21,1149.79 ; U3.48@3053,1361.18 C12.2@3053,1480 ; U3.24 3269.27,1097.73 3217.21,1149.79 ; U3.24@3269.69,1041.34 3269.69,1039.55 3269.69,791.68 v1(3224,746) 3446,746 3497,695 R32.1 R31.1 R30.1 3773,329 3797,305 JTAG.1 JTAG.2 3746,127 3364,127 3344,147 3344,304 3319,329 R34.1 ; U3.36@3320.87,1309.06 C11.2@3427.06,1309.06 ; C11.2 v1(3428,1558) 3492,1558 3528,1522 v1(3528,1467)
  Bottom Layer w10: v1(2709,589) R13.1 ; v1(2880,1411) 3126,1411 3165,1450 3165,1516.27 3203,1554.27 R15.2 3319,1586 3335.8,1602.8 U4.4 ; R22.1@3065,676 R20.1 R19.1 ; R21.1 v1(3224,746) ; J14.3 3416,2110 J14.2@3419,2107 ; v1(3428,1558) 3428,1646.8 U4.4 ; J14.1 J14.2 J14.2@3419,2107 ; v1(3528,1467) 3601,1394 R17.1 Q1.2 ; C21.1 3660,1799 3600,1739 U4.2 U4.4 ; C21.1@3673,1799.85 C19.2 v1(3745,1896) ; U4.4 3419,1822.2 J14.2@3419,2107
pads on no net: DB9.1 DB9.4 DB9.6 DB9.7 DB9.8 DB9.9 DB9.BO1 DB9.BO2 JTAG.17 JTAG.19 MCU_RST.3 MCU_RST.4 U1.11 U1.12 U1.13 U1.14 U2.1 U2.2 U2.10 U2.11 U2.12 U2.13 U2.14 U2.15 U2.16 U2.17 U2.18 U2.19 U2.20 U2.21 U2.22 U2.23 U2.24 U2.27 U2.28

## Polygon pours and split planes (outlines as drawn)
GND on Bottom Layer "Bottom Layer-GND" (solid, remove dead copper, pour order 7): 2292,2197 2292,0 3937.01,0 3937,0.01 3937,2197 2292,2197
GND on Bottom Layer "Bottom Layer-GND" (solid, remove dead copper, pour order 12): 2293,2932 2293,2246 2291,2244 3938,2244 3938,2933 3937,2932 2292,2932
GND on Bottom Layer "Bottom Layer-GND" (solid, remove dead copper, pour order 11): 2292,2977 3938,2977 3938,3936.02 3937.01,3937.01 3936,3936 2291,3936 2291,2978 2292,2977
GND on Top Layer "Bottom Layer-GND" (solid, remove dead copper, pour order 9): 2291,0 2292,0.98 2292,2197 3937,2197 3938,2196.02 3938,2058.95 3938,0.97 3937.01,0 2292,0
GND on Top Layer "Bottom Layer-GND" (solid, remove dead copper, pour order 10): 2293,2977 2293,3936 2292,3937 2349,3937 3937,3937 3937.01,3937.01 3937,3937 3937,2977 2293,2977
GND on Top Layer "Bottom Layer-GND" (solid, remove dead copper, pour order 8): 2293,2933 2292,2932 2292,2245 3937,2245 3937,2933 2293,2933

## Keep-outs
Keep-Out Layer:
  lines w6: 0,0 0,3937.01 3937.01,3937.01 3937.01,0 0,0

## Silkscreen, mask and mechanical layers (free items; w line width, h text height)
Top Overlay:
  lines w6: 0,2933 2294,2933 3937.01,2933 ; 1,2977 2295,2977 3937,2977 ; 2212,1 2212,3930 ; 2291.88,1 2291.88,3937 ; 2292,2244.09 3937.01,2244.09 ; 2293,2204 3937,2204 ; 2752,416 2752,368 2970,368 2970,414 ; 2959,239 2962,236 3126,236 3131,241 3131,359 3129,357 2959,357 2959,239
  text "J2" at 1951,3579 h40 r90
  text "VDD" at 3631,2057 h40 r90
  text "GND" at 2970,2052 h40 r90
  text "GND" at 2382,1829 h40
  text "PC13" at 2798,1629 h40 r90
  text "PC15" at 2600,1628 h40 r90
  text "PC14" at 2697,1628 h40 r90
  text "RX" at 3444,1215 h40
  text "TX" at 3437,950 h40
  text "SCK" at 3141,647 h40 r90
  text "NSS" at 3046,646 h40 r90
  text "MISO" at 3245,642 h40 r90
  text "MOSI" at 3346,642 h40 r90
  text "GND" at 2343,494 h40
  text "GND" at 3761,471 h40
  text "GND" at 2805,381 h40 r90
  text "NRST" at 2857,381 h40 r90
  text "SWIO" at 2909,379 h40 r90
  text "SWCLK" at 2958,375 h40 r90
  text "GND" at 2351,75 h40

## Text inside footprints (layer, text, board x,y; h text height)
DB9: Top Overlay "6" at 3504.42,3336 h50; Top Overlay "1" at 3544.42,3216 h50; Top Overlay "5" at 2944.42,3216 h50; Top Overlay "9" at 2984.42,3336 h50
JTAG: Top Overlay "20" at 2837,96 h50 r180; Top Overlay "19" at 2837,196 h50 r180; Top Overlay "1" at 3897,196 h50 r180; Top Overlay "2" at 3897,96 h50 r180